# Altium PCB ch552t.PcbDoc
Units mil, origin at the board's own origin, x right, y up, seen from the top; angles counter-clockwise.
Board outline 1574.8 x 1574.8 mil, 2 copper layers (Top Layer, Bottom Layer); 30 components, 31 nets, 149 pads, 71 vias.
Unrouted connection lines stored in the file: 1.
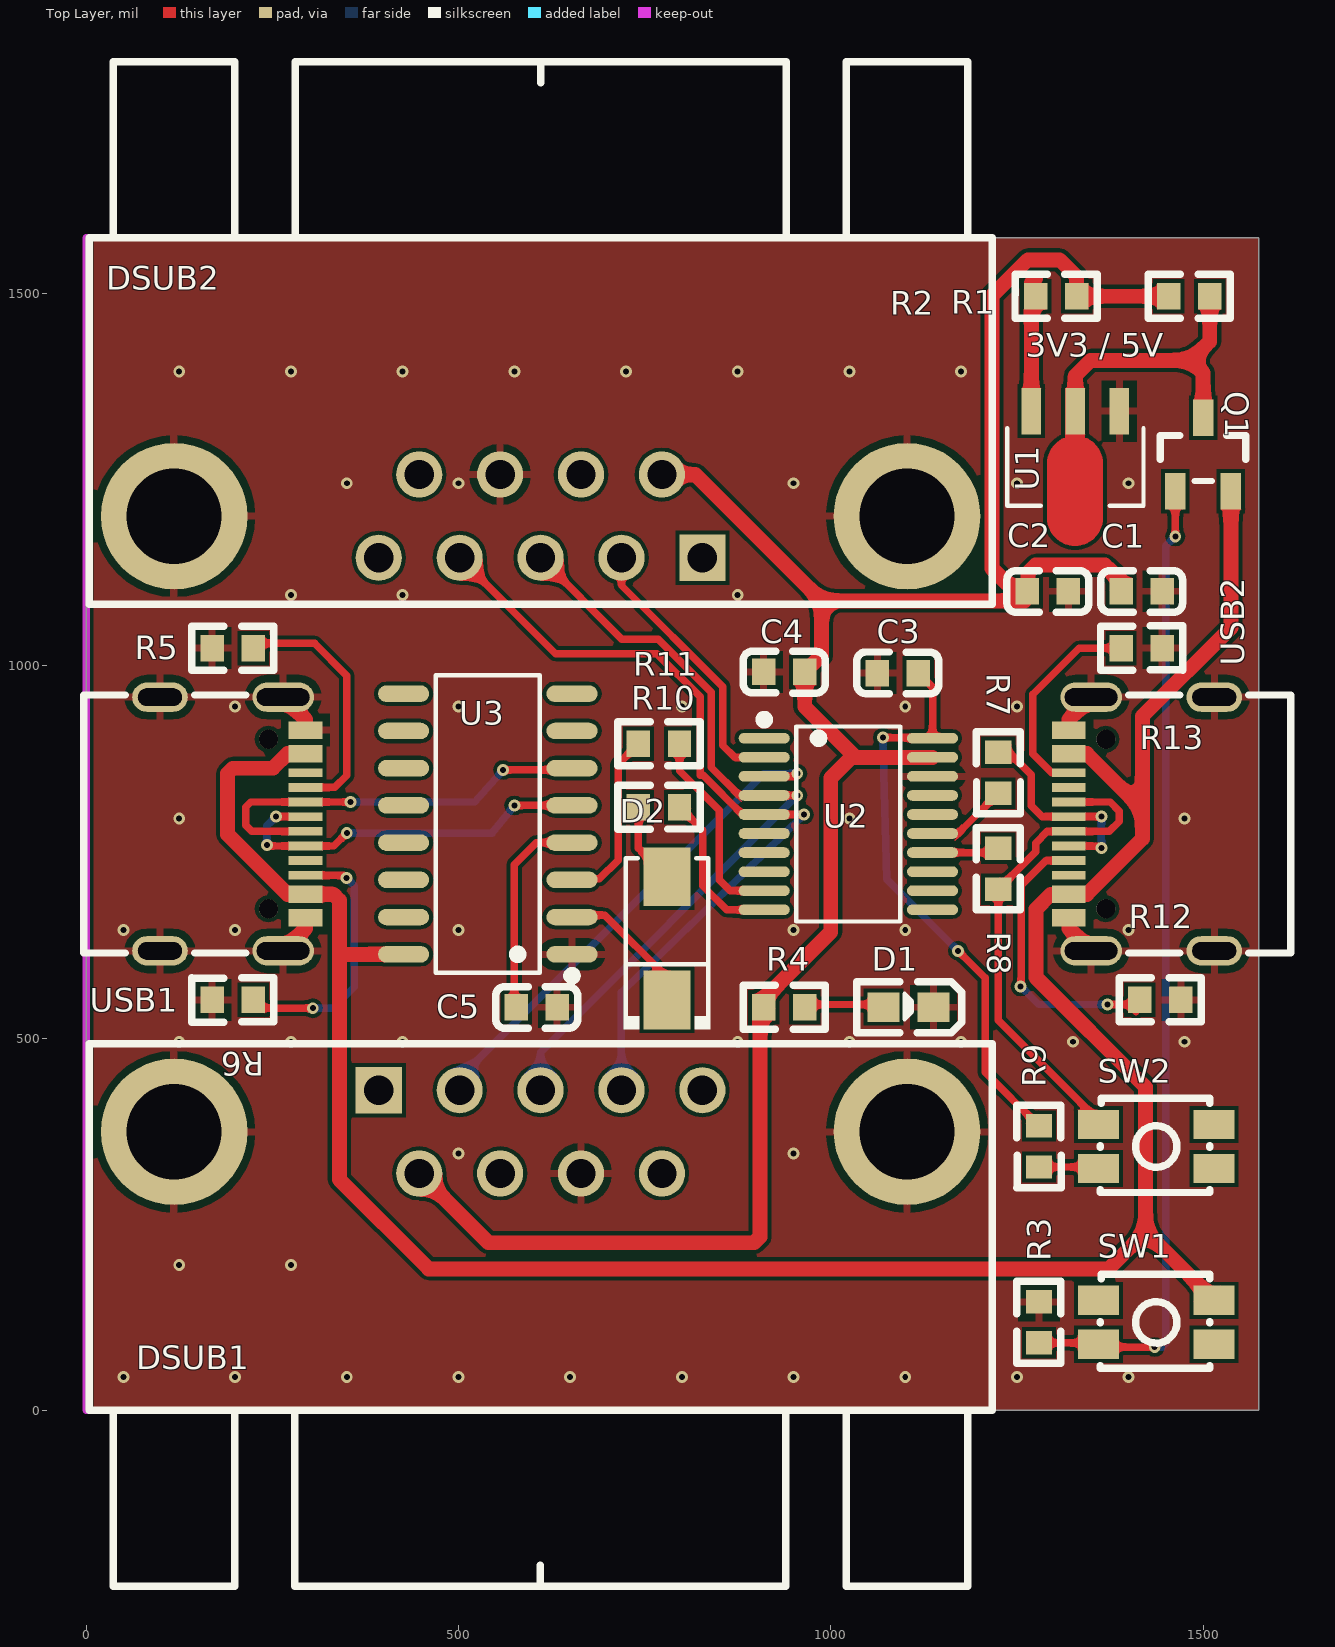
[diagram p0: Top Layer view]
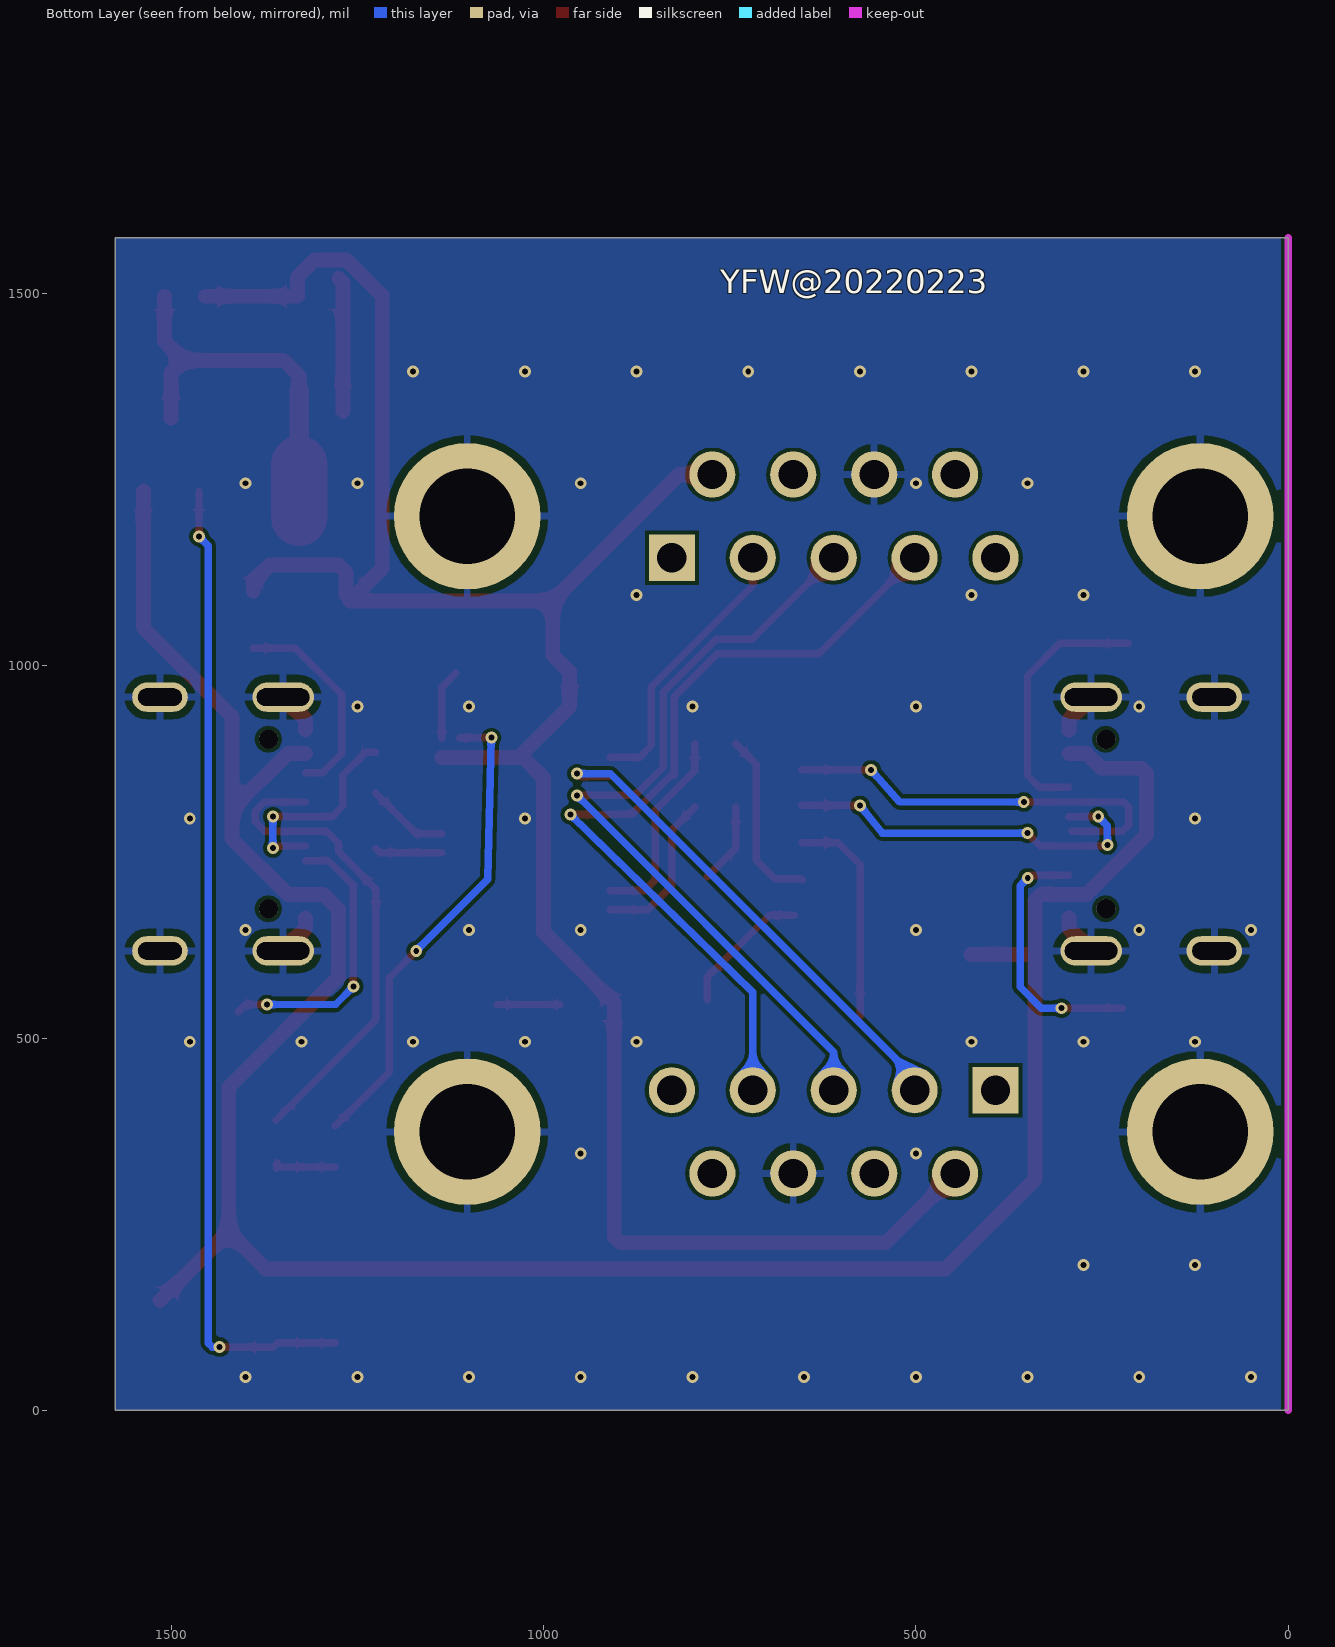
[diagram p1: Bottom Layer view, seen from below]
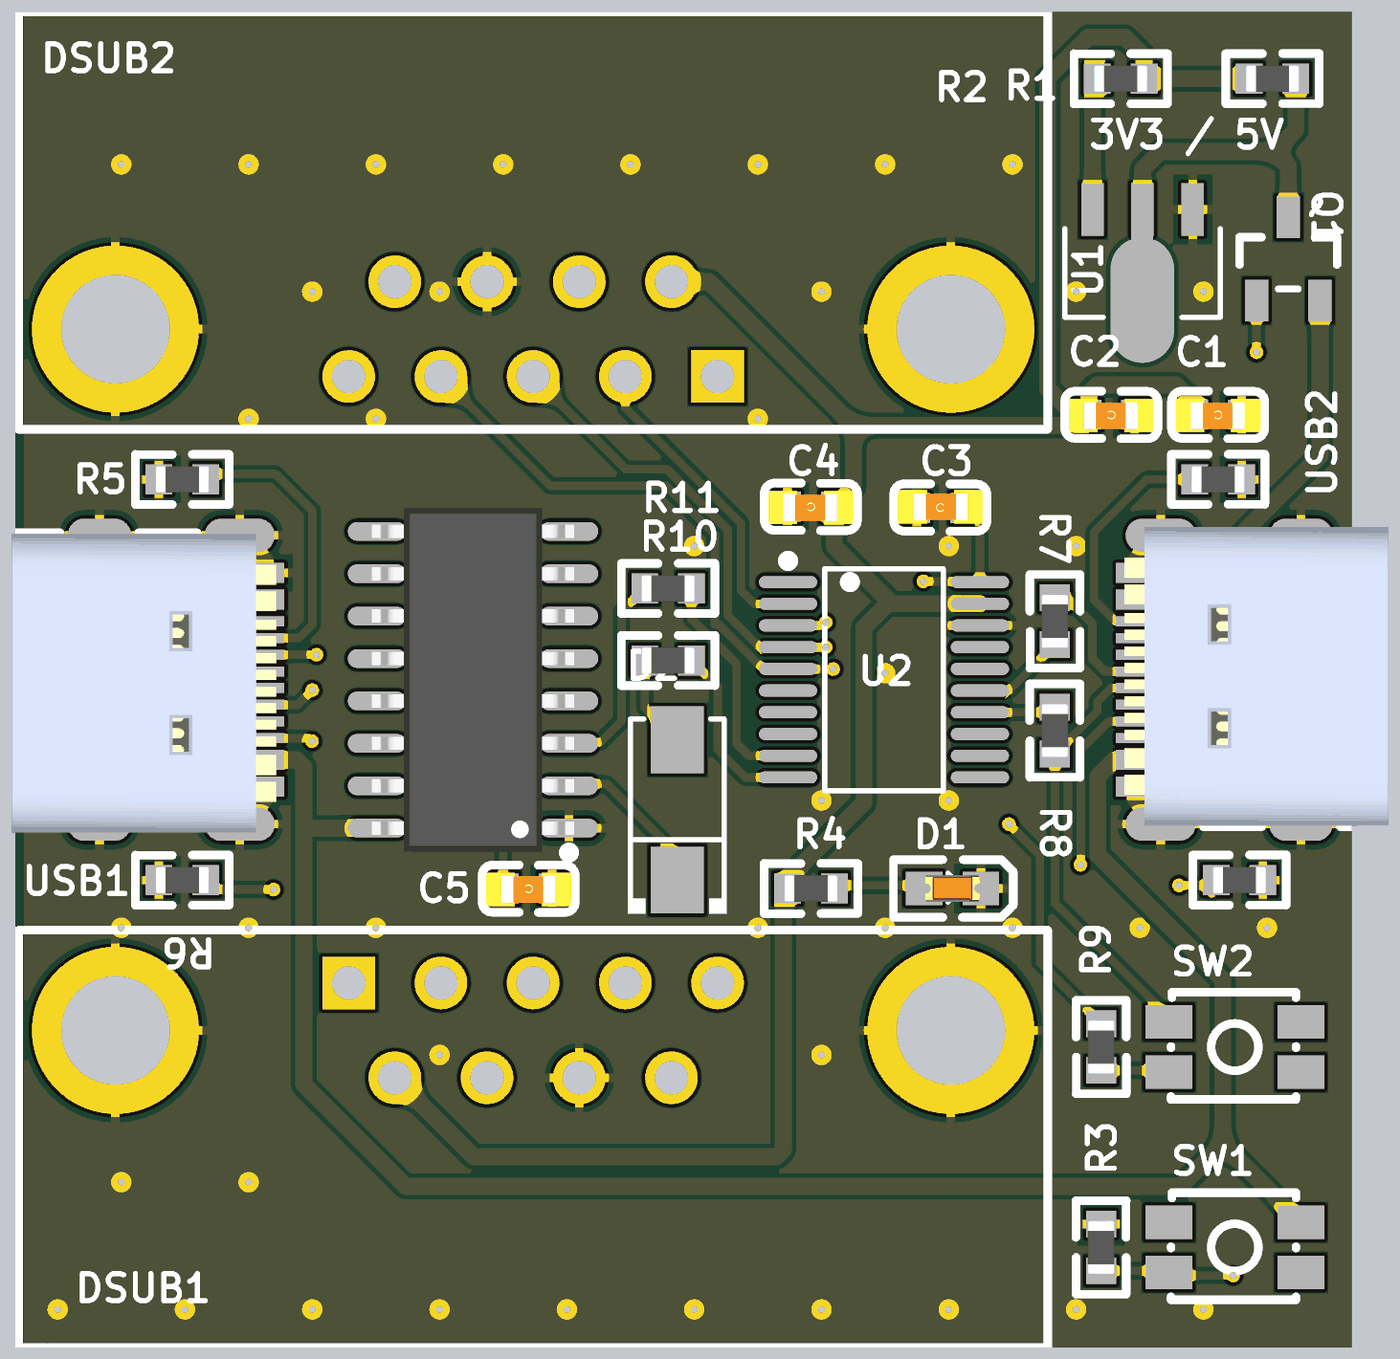
[diagram p2: 3D render of the assembled board from above, using the file's embedded part models]

## Layer stack, top to bottom
Top Solder: solder mask 0.4, Solder Resist, Dk 3.5
Top Layer: signal copper 1.4
Dielectric 1: dielectric 12.6, FR-4, Dk 4.8
Bottom Layer: signal copper 1.4
Bottom Solder: solder mask 0.4, Solder Resist, Dk 3.5

## Board outline
0,0 1574.8,0 1574.8,1574.8 0,1574.8

## Design rules (kind name [scope] priority, off if disabled: settings)
Clearance [All] p1: gap=5 ignorepadtopadclearanceinfootprint=FALSE except(0: Arc-Hole Track-Hole SMDPad-Hole THPad-Hole Via-Hole Fill-Hole Poly-Hole Region-Hole Text-Hole)
PolygonConnect [All] p1: thpad.connectstyle=Relief thpad.reliefconductorwidth=10 thpad.reliefentries=4 thpad.polygonreliefangle="90 Angle" thpad.airgapwidth=10 smdpad.connectstyle=Relief smdpad.reliefconductorwidth=10 smdpad.reliefentries=4 smdpad.polygonreliefangle="90 Angle" smdpad.airgapwidth=10 via.connectstyle=Direct via.reliefconductorwidth=10 via.reliefentries=4 via.polygonreliefangle="90 Angle" via.airgapwidth=10
RoutingVias [All] p1: holewidth=8 width=16 viastyle="Through Hole" minholewidth=6 minwidth=12 maxholewidth=28 maxwidth=50
SolderMaskExpansion [All] p1: expansion=4
Width [All] p1: maxlimit=40 minlimit=6 preferedwidth=6 minimp=50.000000 maximp=50.000000 favimp=50.000000
30 further rules are at their usual default settings.

## Components (designator, comment, footprint, x,y, rotation, side; value= is the part's Value field where it differs from the comment)
C1 "10uF" C0603 1417.32,1100 r180 top
C2 "100nF" C0603 1291.45,1100 r180 top
C3 "3.3uF" C0603 1090,990 r0 top
C4 "100nF" C0603 937.44,991.61 r180 top
C5 "100nF" C0603 605,541.34 r180 top
D1 "LED" LED-0603 1104.44,541.34 r180 top
D2 "SS12" SMA_L4.3-W2.5-LS5.0-RD 780,633.81 r90 top
DSUB1 "Z-SUBDRAM602A002" DSUB-TH_Z-SUBDRAM602A002 610.24,374.02 r270 top locked
DSUB2 "Z-SUBDRAM602A002" DSUB-TH_Z-SUBDRAM602A002 610.24,1200.79 r90 top locked
Q1 "SI2301DS" SOT-23-3_L2.9-W1.3-P1.90-LS2.4-BR 1500,1283.56 r270 top
R1 "0" R0603 1481.38,1496.06 r0 top
R2 "0" R0603 1302.56,1496.06 r180 top
R3 "10K" R0603 1279.53,118.11 r90 top
R4 "1K" R0603 937.6,541.34 r180 top
R5 "5.1K" R0603 196.85,1023.62 r180 top
R6 "5.1K" R0603 196.85,551.18 r180 top
R7 "22" R0603 1225,856.3 r270 top
R8 "22" R0603 1225,727.44 r90 top
R9 "10K" R0603 1279.53,354.33 r270 top
R10 "220" R0603 769.28,810 r0 top
R11 "220" R0603 769.27,895 r0 top
R12 "5.1K" R0603 1442.52,551.18 r0 top
R13 "5.1K" R0603 1417.32,1023.62 r0 top
SW1 "TS-1071SA-A3B3-D4" KEY-SMD_4P-L3.5-W3.0-P1.40-LS4.6 1437.01,118.11 r0 top
SW2 "TS-1071SA-A3B3-D4" KEY-SMD_4P-L3.5-W3.0-P1.40-LS4.6 1437.01,354.33 r0 top
U1 "ME6211A33PG-N" SOT-89_L4.5-W2.5-P1.50-LS4.2-BR 1328.36,1288.39 r90 top
U2 "CH552T" TSSOP-20_L6.5-W4.4-P0.65-LS6.4-BL 1023.62,787.4 r270 top locked
U3 "CH340C" SOP-16_L10.0-W3.9-P1.27-LS6.0-BL 539.37,787.4 r90 top locked
USB1 "TYPEC-304J-BCP16" USB-C-SMD_TYPEC-304J-BCP16 196.85,787.4 r270 top locked
USB2 "TYPEC-304J-BCP16" USB-C-SMD_TYPEC-304J-BCP16 1417.32,787.4 r90 top locked

## Footprints (in the part's own frame and the unit in brackets; to place one, negate y for a bottom-side part, rotate by r counter-clockwise, add the part's x,y. Pads: shape width x height; smd on the part's side, far side on the other; paste and mask are expansions set on the pad)
C0603 [mm]
  rect 0.8x0.9 smd: 1(-0.7,0) 2(0.7,0)
  silkscreen extent -1.4,-0.7 1.4,0.72, body extent -1.29,-0.47 1.31,0.53, height 0.89
DSUB-TH_Z-SUBDRAM602A002 [mm]
  rect 1.575x1.575 hole 1: 1(-1.42,-5.52)
  round 1.575 hole 1: 2(-1.42,-2.76) 3(-1.42,0) 4(-1.42,2.76) 5(-1.42,5.52) 6(1.42,-4.14) 7(1.42,-1.38) 8(1.42,1.38) 9(1.42,4.14)
  round 5 hole 3.25: 10(0,12.5) 11(0,-12.5)
  silkscreen extent -3,-15.4 15.5,15.4
KEY-SMD_4P-L3.5-W3.0-P1.40-LS4.6 [mm]
  rect 1.4x1 smd: 1(-1.975,0.75) 2(1.975,0.75) 3(-1.975,-0.75) 4(1.975,-0.75)
  silkscreen extent -1.91,-1.57 1.83,1.64
LED-0603 [mil]
  rect 43x39 smd: 1(33.5,0) 2(-33.5,0)
  silkscreen extent -72,-34 70,34, body extent -32,-16 32,16, height 24
R0603 [mm]
  rect 0.8x0.9 smd: 1(-0.7,0) 2(0.7,0)
  silkscreen extent -1.4,-0.75 1.4,0.76, body extent -0.8,-0.4 0.8,0.4, height 0.38
SMA_L4.3-W2.5-LS5.0-RD [mm]
  rect 2x1.593 smd: 1(-2.1,0) 2(2.1,0)
  silkscreen extent -3.11,-1.48 2.73,1.48
SOP-16_L10.0-W3.9-P1.27-LS6.0-BL [mm]
  oval 0.56x1.745 smd: 1(-4.445,-2.873) 2(-3.175,-2.873) 3(-1.905,-2.873) 4(-0.635,-2.873) 5(0.635,-2.873) 6(1.905,-2.873) 7(3.175,-2.873) 8(4.445,-2.873) 9(4.445,2.873) 10(3.175,2.873) 11(1.905,2.873) 12(0.635,2.873) 13(-0.635,2.873) 14(-1.905,2.873) 15(-3.175,2.873) 16(-4.445,2.873)
  silkscreen extent -5.33,-3.02 5.08,1.77, body extent -5.15,-3.03 5.15,3.03, height 1.95
SOT-23-3_L2.9-W1.3-P1.90-LS2.4-BR [mm]
  rect 1.25x0.7 smd: 1(1.25,-0.95) 2(1.25,0.95) 3(-1.25,0)
  silkscreen extent -0.65,-1.46 0.9,1.46
SOT-89_L4.5-W2.5-P1.50-LS4.2-BR [mm]
  rect 1.575x0.672 smd: 1(1.356,-1.5) 2(1.356,0) 3(1.356,1.5)
  round 0 smd: 2(-1.356,0.009)
  Top Layer region: -2.283,0.959 -0.429,0.959 -0.385,0.958 -0.34,0.955 -0.296,0.949 -0.252,0.942 -0.208,0.933 -0.165,0.921 -0.123,0.908 -0.081,0.893 -0.04,0.875 0,0.856 0.04,0.835 0.078,0.812 0.115,0.788 0.151,0.761 0.185,0.733 0.219,0.704 0.251,0.673 0.281,0.64 0.31,0.606 0.337,0.571 0.362,0.534 0.386,0.497 0.408,0.458 0.428,0.418 0.447,0.339 2.144,0.339 2.144,-0.321 0.447,-0.321 0.428,-0.401 0.408,-0.44 0.386,-0.479 0.362,-0.517 0.337,-0.553 0.31,-0.588 0.281,-0.622 0.251,-0.655 0.219,-0.686 0.185,-0.716 0.151,-0.744 0.115,-0.77 0.078,-0.795 0.04,-0.818 0,-0.839 -0.04,-0.858 -0.081,-0.875 -0.123,-0.89 -0.165,-0.904 -0.208,-0.915 -0.252,-0.925 -0.296,-0.932 -0.34,-0.937 -0.385,-0.94 -0.429,-0.941 -2.283,-0.941 -2.328,-0.94 -2.372,-0.937 -2.416,-0.932 -2.46,-0.925 -2.504,-0.915 -2.547,-0.904 -2.589,-0.89 -2.631,-0.875 -2.672,-0.858 -2.713,-0.839 -2.752,-0.818 -2.79,-0.795 -2.827,-0.77 -2.863,-0.744 -2.898,-0.716 -2.931,-0.686 -2.963,-0.655 -2.993,-0.622 -3.022,-0.588 -3.049,-0.553 -3.075,-0.517 -3.098,-0.479 -3.12,-0.44 -3.141,-0.401 -3.159,-0.36 -3.175,-0.318 -3.189,-0.276 -3.202,-0.233 -3.212,-0.19 -3.22,-0.146 -3.227,-0.102 -3.231,-0.058 -3.233,-0.013 -3.233,0.031 -3.231,0.076 -3.227,0.12 -3.22,0.164 -3.212,0.208 -3.202,0.251 -3.189,0.294 -3.175,0.336 -3.159,0.377 -3.141,0.418 -3.12,0.458 -3.098,0.497 -3.075,0.534 -3.049,0.571 -3.022,0.606 -2.993,0.64 -2.963,0.673 -2.931,0.704 -2.898,0.733 -2.863,0.761 -2.827,0.788 -2.79,0.812 -2.752,0.835 -2.713,0.856 -2.672,0.875 -2.631,0.893 -2.589,0.908 -2.547,0.921 -2.504,0.933 -2.46,0.942 -2.416,0.949 -2.372,0.955 -2.328,0.958
  silkscreen extent -1.87,-2.33 0.78,2.33
TSSOP-20_L6.5-W4.4-P0.65-LS6.4-BL [mm]
  oval 0.364x1.742 smd: 1(-2.925,-2.871) 2(-2.275,-2.871) 3(-1.625,-2.871) 4(-0.975,-2.871) 5(-0.325,-2.871) 6(0.325,-2.871) 7(0.975,-2.871) 8(1.625,-2.871) 9(2.275,-2.871) 10(2.925,-2.871) 11(2.925,2.871) 12(2.275,2.871) 13(1.625,2.871) 14(0.975,2.871) 15(0.325,2.871) 16(-0.325,2.871) 17(-0.975,2.871) 18(-1.625,2.871) 19(-2.275,2.871) 20(-2.925,2.871)
  silkscreen extent -3.71,-3.02 3.33,1.77
USB-C-SMD_TYPEC-304J-BCP16 [mm]
  oval 1x2.1 hole 0.6 slot 1.8 at 90 deg: 13(-4.325,1.719) 14(4.325,1.719)
  oval 1x1.9 hole 0.6 slot 1.5 at 90 deg: 15(-4.325,-2.481) 16(4.325,-2.481)
  rect 0.6x1.15 smd: A1B12(-3.2,2.481) A4B9(-2.4,2.481) B1A12(3.2,2.481) B4A9(2.4,2.481)
  rect 0.3x1.15 smd: A5(-1.25,2.481) A6(-0.25,2.481) A7(0.25,2.481) A8(1.25,2.481) B5(1.75,2.481) B6(0.75,2.481) B7(-0.75,2.481) B8(-1.75,2.481)
  round 0.65 hole 0.65 unplated: ""(-2.89,1.219) ""(2.89,1.219)
  silkscreen extent -4.4,-5.08 4.4,0.44, body extent -4.37,-5.09 4.57,2.81, height 3.11

## Part data
C1 C2 C3 C4 C5: library part CAP_0603, BOM_Manufacturer=YAGEO, BOM_Manufacturer Part=CC0603GRNPO9BN200, BOM_Supplier=LCSC, BOM_Supplier Part=C325469, Contributor=LCSC, nameAlias=Capacitance, spicePre=C, spiceSymbolName=CC0603GRNPO9BN200
D1: library part LED-Y, BOM_Manufacturer Part=?, nameAlias=Model, spicePre=D, spiceSymbolName=LED
D2: "C727049", BOM_JLCPCB Part Class="Extended Part", BOM_Manufacturer=TWGMC, BOM_Manufacturer Part=SS12, BOM_Supplier=LCSC, BOM_Supplier Part=C727049, Contributor=LCSC, spicePre=D, spiceSymbolName=SS12_C727049
DSUB1 DSUB2: BOM_JLCPCB Part Class="Extended Part", BOM_Manufacturer=ZHENGLING, BOM_Manufacturer Part=Z-SUBDRAM602A002, BOM_Supplier=LCSC, BOM_Supplier Part=C115169, Contributor=LCSC, spicePre=D, spiceSymbolName=Z-SUBDRAM602A002
Q1: BOM_Manufacturer="TECH PUBLIC(台舟)", BOM_Manufacturer Part=SI2301DS, BOM_Supplier=LCSC, BOM_Supplier Part=C2841444, Contributor=LCSC, spicePre=Q, spiceSymbolName=SI2301DS
R1 R2 R3 R4 R5 R6 R7 R8 R9 R10 R11 R12 R13: library part RES_0603, BOM_Manufacturer=LIZ, BOM_Manufacturer Part=CR0603JA0301G, BOM_Supplier=LCSC, BOM_Supplier Part=C101323, nameAlias="Resistance (Ohms)", spicePre=R, spiceSymbolName=CR0603JA0301G
SW1 SW2: BOM_JLCPCB Part Class="Extended Part", BOM_Manufacturer=Yuandi, BOM_Manufacturer Part=TS-1071SA-A3B3-D4, BOM_Supplier=LCSC, BOM_Supplier Part=C498309, Contributor=LCSC, spicePre=S, spiceSymbolName=TS-1071SA-A3B3-D4
U1: BOM_JLCPCB Part Class="Extended Part", BOM_Manufacturer="Nanjing Micro One Elec", BOM_Manufacturer Part=ME6211A33PG-N, BOM_Supplier=LCSC, BOM_Supplier Part=C236673, Contributor=LCSC, spicePre=U, spiceSymbolName=ME6211A33PG-N
U2 U3: BOM_JLCPCB Part Class="Extended Part", BOM_Manufacturer=WCH, BOM_Supplier=LCSC, spicePre=U
  U2: BOM_Manufacturer Part=CH552T, BOM_Supplier Part=C111367, spiceSymbolName=CH552T
  U3: BOM_Manufacturer Part=CH340C, BOM_Supplier Part=C84681, spiceSymbolName=CH340C
USB1 USB2: BOM_JLCPCB Part Class="Extended Part", BOM_Manufacturer=XUNPU(讯普), BOM_Manufacturer Part=TYPEC-304J-BCP16, BOM_Supplier=LCSC, BOM_Supplier Part=C2835315, Contributor=LCSC, spicePre=U, spiceSymbolName=TYPEC-304J-BCP16

## Via types
v1: diameter 16, hole 8, Top Layer to Bottom Layer, 71 vias

## Nets (pads, with @x,y where several pads share a name; then routed paths per layer and width w, separated by ;. In a path a pad name is that pad's centre, name@x,y a point inside that pad or via, vN(x,y) a via of type N, cw(c..) or ccw(c..) an arc to the next point about the centre after c; other vN are vias at no path point)
+3V3: R2.2 U1.3 | length 180.6
  Top Layer w20: U1.3 1269.3,1514.3 1275,1520
+5V: Q1.3 R1.2 U1.2 | length 508.9
  Top Layer w20: 1328.01,1225 1328.01,1341.44 1328.36,1341.79 1328.36,1389.47 1348.89,1410 1483.38,1410 ; Q1.3 1500,1393.38 1483.38,1410 ; R1.2 1508.94,1435.56 1483.38,1410
DTR: U3.13
GND: C1.1 C2.1 C3.1 C4.2 C5.1 D1.2 DSUB1.8 DSUB1.10 DSUB1.11 DSUB2.8 DSUB2.10 DSUB2.11 R3.2 R5.2 R6.2 R12.2 R13.2 U1.1 U2.18 U3.1 USB1.13 USB1.14 USB1.15 USB1.16 USB1.A1B12 USB1.B1A12 USB2.13 USB2.14 USB2.15 USB2.16 USB2.A1B12 USB2.B1A12 | length 227
  Top Layer w20: USB1.14 294.54,647.15 USB1.B1A12 ; USB1.13 294.54,927.65 USB1.A1B12 ; USB2.A1B12 1319.63,647.15 USB2.13 ; USB2.B1A12 1319.63,927.65 USB2.14
  other v1: 50,45 200,45 350,45 500,45 650,45 800,45 950,45 1100,45 1250,45 1400,45 125,195 275,195 500,345 950,345 125,495 275,495 425,495 875,495 1025,495 1175,495 1325,495 1475,495 50,645 200,645 500,645 950,645 1100,645 1400,645 125,795 1025,795 1475,795 200,945 500,945 800,945 1100,945 1250,945 275,1095 425,1095 875,1095 350,1245 500,1245 950,1245 1250,1245 1400,1245 125,1395 275,1395 425,1395 575,1395 725,1395 875,1395 1025,1395 1175,1395
JOYSTICK_CLK: DSUB1.4 DSUB2.4 U2.5 | length 1136.5
  Top Layer w10: DSUB2.4 630.32,1016.15 766.53,1016.15 824.42,958.26 824.42,852.72 828.8,852.72 881.32,800.2 U2.5 ; U2.5@914.4,800.04 v1(963.81,800.04)
  Bottom Layer w10: DSUB1.4 718.89,561.69 v1(963.81,800.04)
JOYSTICK_DAT0: DSUB1.2 U2.3 | length 685.2
  Top Layer w10: U2.3 951.38,851.38 v1(955,855)
  Bottom Layer w10: DSUB1.2 501.57,446.57 910,855 v1(955,855)
JOYSTICK_DAT1: DSUB2.2 U2.2 | length 370.6
  Top Layer w10: DSUB2.2 718.9,1107.7 855,971.6 855,892.79 870.83,876.97 U2.2
JOYSTICK_LATCH: DSUB1.3 DSUB2.3 U2.4 | length 1072.2
  Top Layer w10: DSUB2.3 719.45,1035.67 768.22,1035.67 839.42,964.47 839.42,863.31 876.94,825.79 U2.4 ; U2.4@913.23,825.75 v1(955,825.75)
  Bottom Layer w10: DSUB1.3 610.23,480.98 v1(955,825.75)
NetC5_2: C5.2 U3.4 | length 292.6
  Top Layer w10: C5.2@574.89,530 574.89,732.76 604.53,762.4 U3.4
NetD1_1: D1.1 R4.1 | length 85.1
  Top Layer w10: R4.1@977.56,545 1061.92,545 D1.1@1062.44,544.47
NetD2_1: D2.1 U3.2 | length 181.8
  Top Layer w10: U3.2@663.09,665 696.45,665 780,581.45 D2.1
NetD2_2: D2.2 R10.1 | length 109.4
  Top Layer w10: R10.1 741.72,754.77 D2.2
NetQ1_1: Q1.1 R3.1 SW1.3 | length 1324.4
  Top Layer w10: R3.1 1357.28,90.55 SW1.3 1362.83,85 v1(1435,85) ; v1(1462.6,1173.57) Q1.1
  Bottom Layer w10: v1(1435,85) 1445,85 1450,90 1450,1160.97 v1(1462.6,1173.57)
NetR5_1: R5.1 USB1.A5 | length 349.2
  Top Layer w10: R5.1@215,1030 306.72,1030 350,986.72 350,852.52 334.09,836.61 USB1.A5
NetR6_1: R6.1 USB1.B5 | length 356.6
  Top Layer w10: R6.1@222.56,540 v1(304.35,540) ; USB1.B5 346.17,718.51 v1(349.67,715)
  Bottom Layer w10: v1(304.35,540) 331.53,540 360,568.47 360,704.67 v1(349.67,715)
NetR7_2: R7.2 U2.15 | length 110.8
  Top Layer w10: U2.15 1170.87,774.61 R7.2
NetR8_2: R8.2 U2.14 | length 90.8
  Top Layer w10: U2.14 1219.01,749.02 R8.2
NetR9_2: R9.2 SW2.3 | length 83.3
  Top Layer w10: R9.2 1357.28,326.77 SW2.3 ; SW2.3@1357.28,332.44 SW2.3@1359.25,330.47
NetR11_1: R11.1 U3.3 | length 240.4
  Top Layer w10: U3.3 653.76,713.7 689.29,713.7 714.33,738.75 714.33,867.62 R11.1
NetR12_1: R12.1 USB2.A5 | length 382.7
  Top Layer w10: v1(1255,569.27) 1255.52,569.8 1255.52,705 1288.72,738.19 USB2.A5 ; v1(1371.32,545) 1400.36,545 R12.1@1409.88,535.47
  Bottom Layer w10: v1(1255,569.27) 1279.27,545 v1(1371.32,545)
NetR13_1: R13.1 USB2.B5 | length 283.1
  Top Layer w10: USB2.B5 1296.63,856.3 1271.06,881.87 1271.06,961.35 1333.33,1023.62 R13.1
RTS: U3.14
RXD0: R10.2 U2.10 | length 214.4
  Top Layer w10: R10.2 827.76,779.08 827.76,704.72 860.24,672.24 U2.10
TXD0: R11.2 U2.9 | length 271.1
  Top Layer w10: R11.2 796.83,859.09 850,805.93 850,712.6 864.77,697.83 U2.9
USB0_DN: U3.6 USB1.A7 USB1.B7 | length 565.5
  Top Layer w10: USB1.A7@290.76,777.56 222.44,777.56 214.22,785.78 214.22,810.24 220.91,816.93 USB1.B7 v1(355,816.93) ; v1(560,860) U3.6@653.09,860
  Bottom Layer w10: v1(355,816.93) 521.93,816.93 v1(560,860)
USB0_DP: U3.5 USB1.A6 USB1.B6 | length 518.8
  Top Layer w10: v1(242.86,759.22) 244.2,757.87 USB1.B6 332.77,757.87 v1(350,775.1) ; v1(255,797.24) USB1.A6 ; v1(575,812.4) U3.5@653.09,812.4
  Bottom Layer w10: v1(242.86,759.22) 242.72,759.08 242.72,784.96 v1(255,797.24) ; v1(350,775.1) 545.1,775.1 v1(575,812.4)
USB1_DN: R7.1 USB2.A7 USB2.B7 | length 285.5
  Top Layer w10: R7.1 1238.78,883.85 1269.3,853.34 1269.3,811.68 1283.73,797.24 USB2.A7 v1(1363.42,797.25) ; USB2.B7 1360.85,757.87 v1(1363.42,755.3)
  Bottom Layer w10: v1(1363.42,755.3) v1(1363.42,797.25)
USB1_DP: R8.1 SW2.1 USB2.A6 USB2.B6 | length 659.5
  Top Layer w10: USB2.B6 1375.06,816.93 1387.34,804.66 1387.34,790.8 1374.09,777.56 USB2.A6 1290.91,777.56 1275,761.65 1275,749.88 R8.1 1225,523.79 SW2.1@1359.25,389.53
USB_+5V: Q1.2 SW1.2 U3.16 USB1.A4B9 USB1.B4A9 USB2.A4B9 USB2.B4A9 | length 3451.9
  Top Layer w20: USB1.A4B9 270.38,881.89 250.69,862.2 196.81,862.2 190,855.39 190,773.29 270.38,692.91 USB1.B4A9 332.09,692.91 340,685 340,610 ; U3.16 342.4,612.4 340,610 ; USB2.B4A9 1343.8,881.89 1418.46,807.22 ; SW1.2 1422.74,239.66 ; Q1.2 1537.4,1051.02 1418.46,932.08 1418.46,807.22 ; 340,610 340,310 460,190 1373.08,190 1422.74,239.66 ; 1418.46,807.22 1418.46,767.57 1343.8,692.91 USB2.A4B9 1295.39,692.91 1275.52,673.04 1275.52,581.27 1422.74,434.06 1422.74,239.66
V33: C3.2 R9.1 U2.20 | length 744.2
  Top Layer w10: v1(1070,903.35) U2.20@1112.56,903.35 ; C3.2 1136.65,970.9 U2.20 ; v1(1170.87,617.13) 1207.36,580.64 1207.36,454.05 R9.1
  Bottom Layer w10: v1(1070,903.35) 1075,713 v1(1170.87,617.13)
VIN: C1.2 C2.2 C4.1 DSUB1.6 DSUB2.6 R1.1 R2.1 R4.2 U2.19 | length 3008.2
  Top Layer w20: DSUB1.6 540.35,225 896.97,225 905,233.03 905,547.44 1000,642.44 1000,849.13 1030.43,879.57 ; DSUB2.6 817.92,1256.69 987.52,1087.09 ; U2.19 1033.03,876.97 1030.43,879.57 ; C2.2@1265.06,1095 1265.06,1125.06 1275,1135 1368.08,1135 1389.76,1113.32 C1.2 ; R1.1 R2.1 1330.12,1522.21 1307.32,1545 1264.64,1545 1216.54,1496.89 1216.54,1130.55 1260,1087.09 987.52,1087.09 ; 987.52,1087.09 987.52,1014.13 C4.1 965,945 1030.43,879.57
pads on no net: DSUB1.1 DSUB1.5 DSUB1.7 DSUB1.9 DSUB2.1 DSUB2.5 DSUB2.7 DSUB2.9 SW1.1 SW1.4 SW2.2 SW2.4 U2.1 U2.6 U2.7 U2.8 U2.11 U2.12 U2.13 U2.16 U2.17 U3.7 U3.8 U3.9 U3.10 U3.11 U3.12 U3.15 USB1. USB1.A8 USB1.B8 USB2. USB2.A8 USB2.B8

## Polygon pours and split planes (outlines as drawn)
GND on Top Layer "GND_L01_P000" (solid, remove dead copper, pour order 0): 3.94,1574.8 0,1570.86 0,0 1574.8,0 1574.8,1574.8 0,1574.8
GND on Bottom Layer "GND_L02_P002" (solid, remove dead copper, pour order 2): 0,1574.8 0,0 1574.8,0 1574.8,1574.8 8.74,1574.8 3.94,1570

## Keep-outs
Keep-Out Layer:
  lines w10: 0,0 0,1574.8

## Silkscreen, mask and mechanical layers (free items; w line width, h text height)
Top Overlay:
  text "3V3 / 5V" at 1262.09,1415 h32
Bottom Overlay:
  text "YFW@20220223" at 762.47,1500 h32
Mechanical 1:
  the board outline again, w10